# Altium PCB DAQ_PCB.PcbDoc
Units mm, origin at the board's own origin, x right, y up, seen from the top; angles counter-clockwise.
Board outline 85 x 50 mm, 2 copper layers (Top Layer, Bottom Layer); 59 components, 59 nets, 291 pads, 0 vias.
Unrouted connection lines stored in the file: 136.
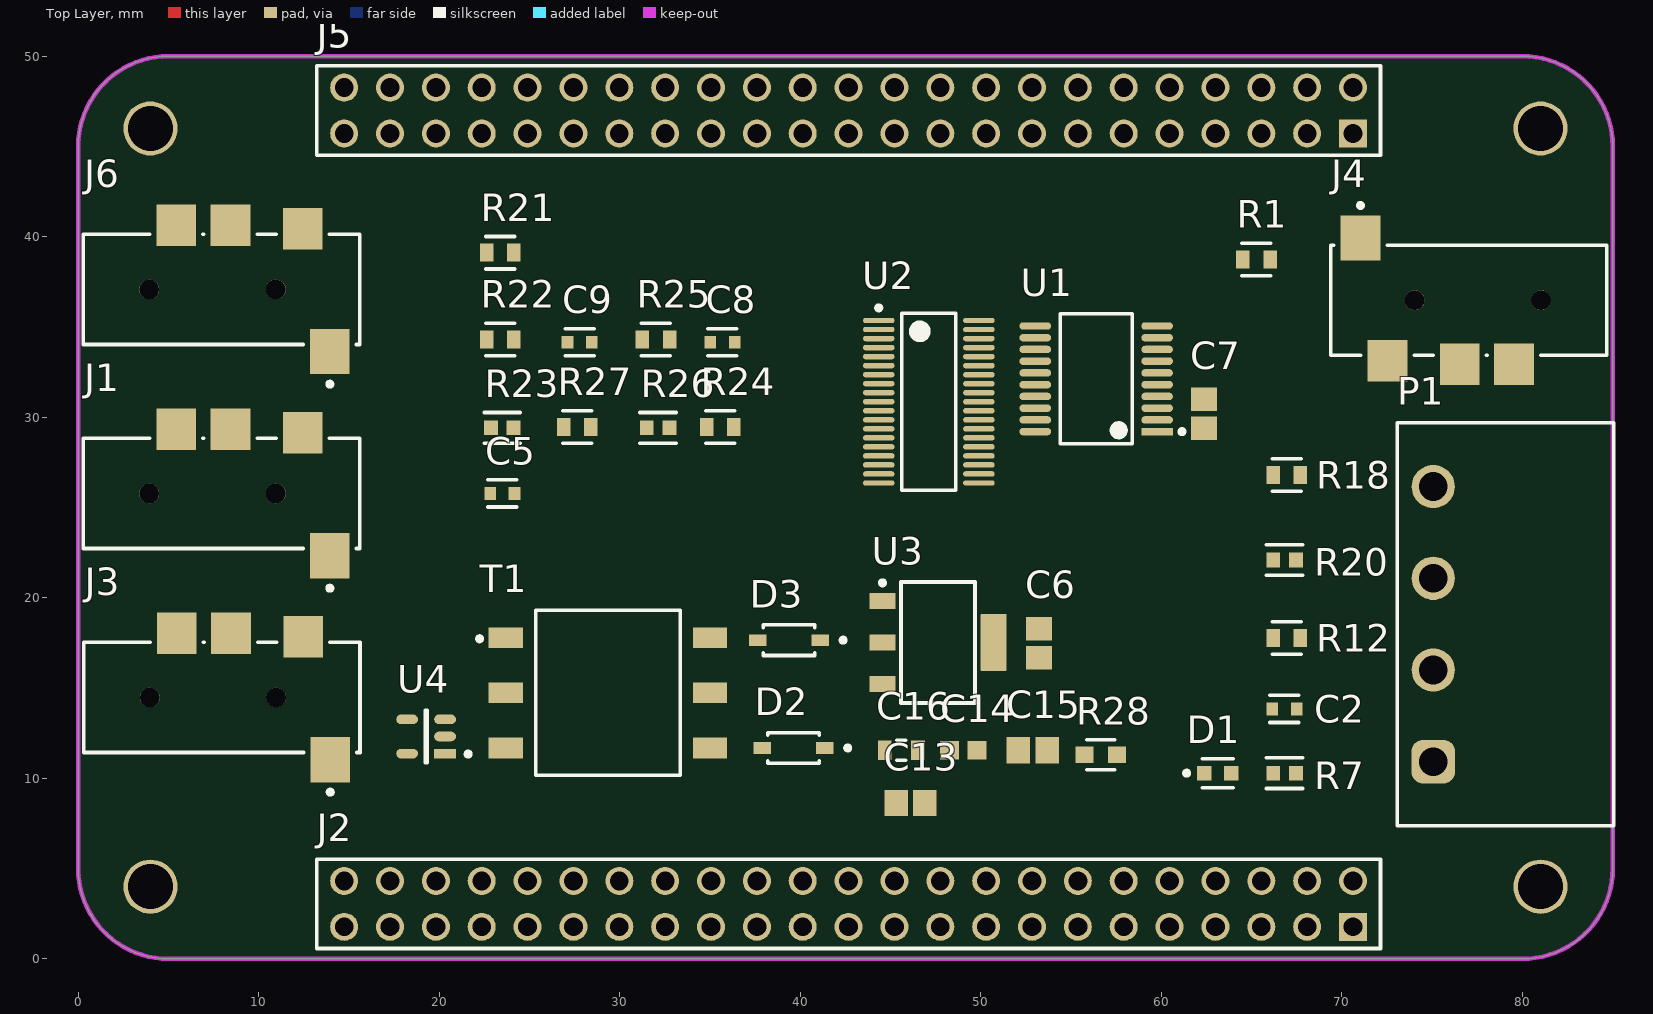
[diagram p0: Top Layer view]
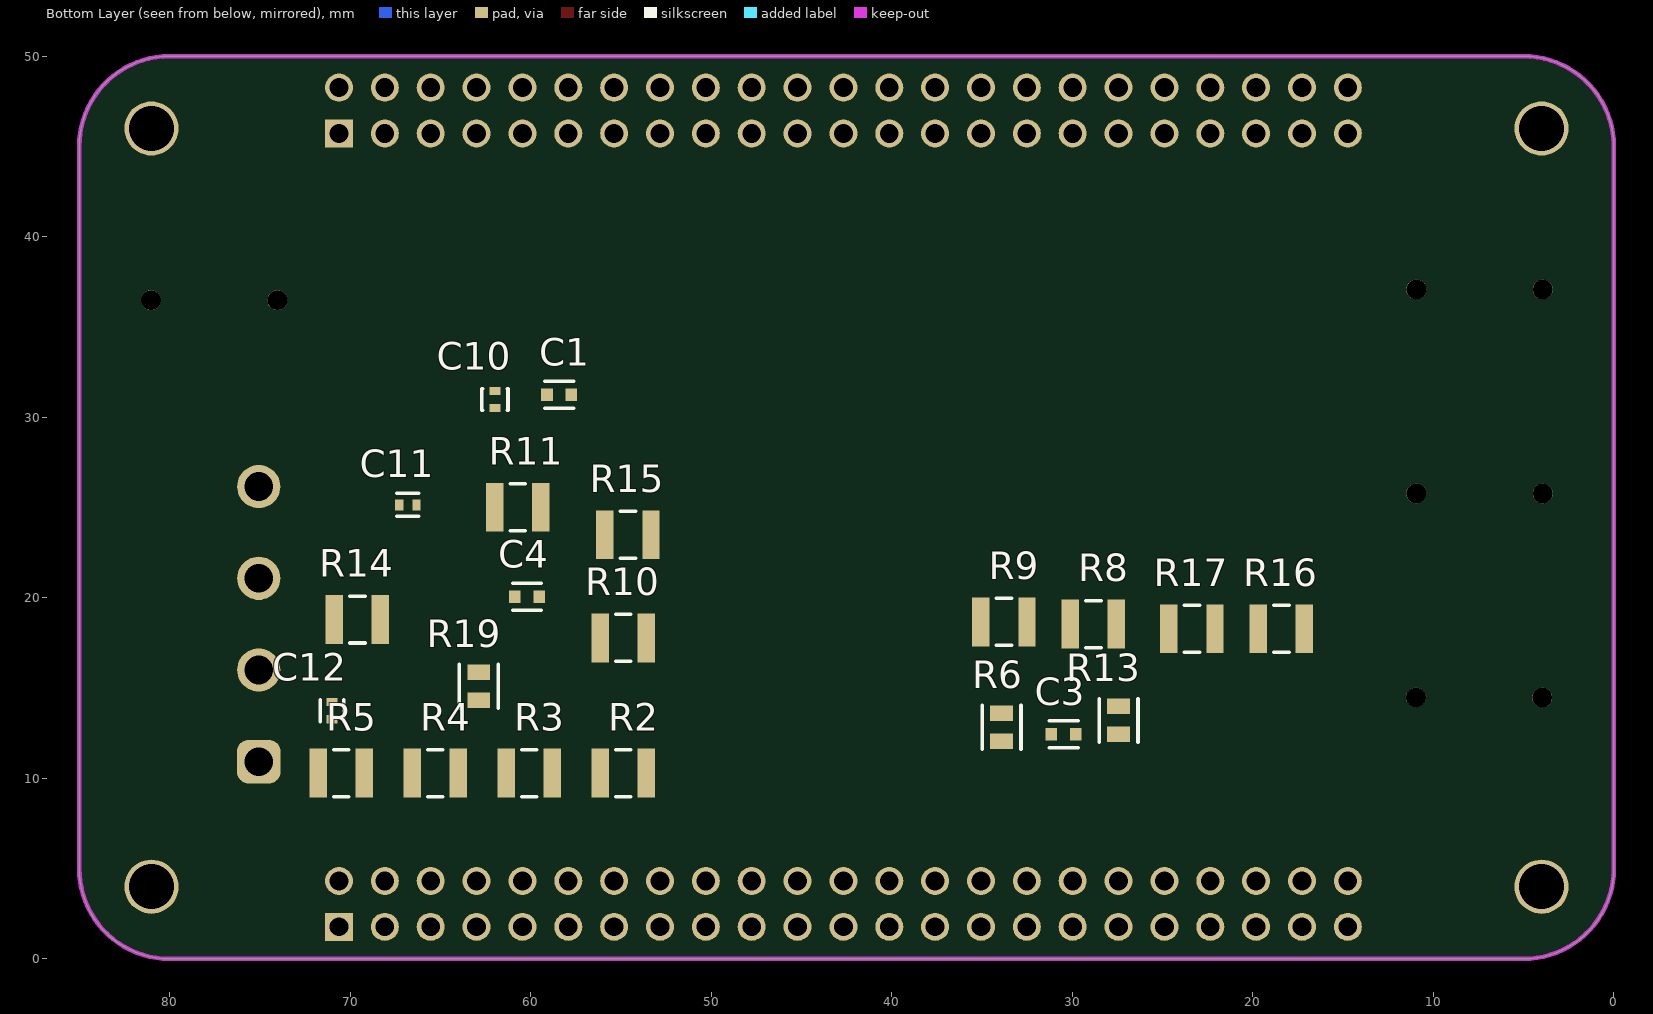
[diagram p1: Bottom Layer view, seen from below]

## Layer stack, top to bottom
Top Solder: solder mask 0.0102, Solder Resist, Dk 3.5
Top Layer: signal copper 0.0356
Dielectric 1: dielectric 0.32, FR-4, Dk 4.8
Bottom Layer: signal copper 0.0356
Bottom Solder: solder mask 0.0102, Solder Resist, Dk 3.5

## Board outline
5,0 cw(c5,5) 0,5 0,45 cw(c5,45) 5,50 80,50 cw(c80,45) 85,45 85,5 cw(c80,5) 80,0

## Design rules (kind name [scope] priority, off if disabled: settings)
Clearance [All] p1: gap=0.254 ignorepadtopadclearanceinfootprint=FALSE
PolygonConnect [All] p1: connectstyle=Relief reliefconductorwidth=0.254 reliefentries=4 polygonreliefangle="90 Angle" airgapwidth=0.254
RoutingVias [All] p1: holewidth=0.711 width=1.27 viastyle="Through Hole" minholewidth=0.711 minwidth=1.27 maxholewidth=0.711 maxwidth=1.27
SolderMaskExpansion [All] p1: expansion=0.102 istentingtop=FALSE
SupplyNets "Schematic Supply Nets_6" [InNet('GNDD')] p1: voltage=0.000
SupplyNets "Schematic Supply Nets_5" [InNet('+3V3')] p2: voltage=0.000
SupplyNets "Schematic Supply Nets_4" [InNet('GND_ISO')] p3: voltage=0.000
SupplyNets "Schematic Supply Nets_3" [InNet('+V_ISO')] p4: voltage=0.000
SupplyNets "Schematic Supply Nets_1" [InNet('+5V_ISO')] p5: voltage=0.000
SupplyNets "Schematic Supply Nets" [InNet('+5V')] p6: voltage=0.000
Width [All] p1: maxlimit=0.254 minlimit=0.254 preferedwidth=0.254
30 further rules are at their usual default settings.

## Components (designator, comment, footprint, x,y, rotation, side; value= is the part's Value field where it differs from the comment)
C1 "GCD188R71H472KA01D" FP-GCD188-0_1-MFG 58.42,31.242 r180 bottom
C2 "GCD188R71H472KA01D" FP-GCD188-0_1-MFG 66.816,13.843 r0 top
C3 "GCD188R71H472KA01D" FP-GCD188-0_1-MFG 30.48,12.446 r180 bottom
C4 "GCD188R71H472KA01D" FP-GCD188-0_1-MFG 60.198,20.066 r180 bottom
C5 "GCD188R71H472KA01D" FP-GCD188-0_1-MFG 23.493,25.781 r0 top
C6 "100nF" CAPC2013X145X50NL20T25 53.213,17.488 r270 top
C7 "100nF" CAPC2013X145X50NL20T25 62.357,30.188 r90 top
C8 "GCD188R71H472KA01D" FP-GCD188-0_1-MFG 35.687,34.163 r0 top
C9 "GCD188R71H472KA01D" FP-GCD188-0_1-MFG 27.773,34.163 r0 top
C10 "2.2uF" FP-ZRB155-0_2-MFG 61.976,30.988 r90 bottom
C11 "10uF" FP-GRM155-0_2-MFG 66.802,25.146 r180 bottom
C12 "10uF" FP-GRM155-0_2-MFG 70.993,13.749 r90 bottom
C13 "100nF" CAPC2013X145X50NL20T25 46.101,8.636 r180 top
C14 "330nF" CAPC1608X90X35NL15T15 49.022,11.557 r180 top
C15 "100nF" CAPC2013X145X50NL20T25 52.87,11.557 r0 top
C16 "1uF" FP-CGA3E-0_3-0_1-IPC_B 45.593,11.557 r0 top
D1 "LG Q396-PS-35" FP-LG_Q396-MFG 63.119,10.287 r0 top
D2 "BAT46ZFILM" FP-SOD-123-MFG 39.624,11.684 r180 top value=10pF
D3 "BAT46ZFILM" FP-SOD-123-MFG 39.37,17.653 r180 top value=10pF
J1 "SJ2-3574A-SMT-TR" FP-SJ2-3574A-SMT-TR-MFG 7.937,25.781 r0 top
J2 "SSW-123-06-T-D" SMTC-SSW-123-06-X-D 70.612,1.778 r180 top
J3 "SJ2-3574A-SMT-TR" FP-SJ2-3574A-SMT-TR-MFG 7.961,14.484 r0 top
J4 "SJ2-3574A-SMT-TR" FP-SJ2-3574A-SMT-TR-MFG 77.026,36.484 r180 top
J5 "SSW-123-06-T-D" SMTC-SSW-123-06-X-D 70.612,45.72 r180 top
J6 "SJ2-3574A-SMT-TR" FP-SJ2-3574A-SMT-TR-MFG 7.937,37.084 r0 top
P1 "691313510004" 691313510004 79.057,18.542 r90 top
R1 "CRCW06033K30FKECHP" FP-CRCW0603-HPe3-MFG 65.266,38.735 r0 top
R2 "270k" FP-CRGCQ1210-IPC_C 54.864,10.287 r180 bottom value=270KΩ
R3 "270k" FP-CRGCQ1210-IPC_C 60.071,10.287 r180 bottom value=270KΩ
R4 "270k" FP-CRGCQ1210-IPC_C 65.278,10.287 r180 bottom value=270KΩ
R5 "270k" FP-CRGCQ1210-IPC_C 70.485,10.287 r180 bottom value=270KΩ
R6 "22k" FP-ESR10-IPC_C 33.909,12.827 r90 bottom
R7 "CRGCQ0603F100R" FP-CRGCQ0603-IPC_C 66.822,10.287 r0 top value=100Ω
R8 "270k" FP-CRGCQ1210-IPC_C 28.829,18.542 r180 bottom value=270KΩ
R9 "270k" FP-CRGCQ1210-IPC_C 33.782,18.669 r180 bottom value=270KΩ
R10 "270k" FP-CRGCQ1210-IPC_C 54.864,17.78 r180 bottom value=270KΩ
R11 "270k" FP-CRGCQ1210-IPC_C 60.713,25.019 r180 bottom value=270KΩ
R12 "CRCW06033K30FKECHP" FP-CRCW0603-HPe3-MFG 66.941,17.78 r0 top
R13 "22k" FP-ESR10-IPC_C 27.432,13.208 r90 bottom
R14 "270k" FP-CRGCQ1210-IPC_C 69.596,18.796 r180 bottom value=270KΩ
R15 "270k" FP-CRGCQ1210-IPC_C 54.61,23.495 r180 bottom value=270KΩ
R16 "270k" FP-CRGCQ1210-IPC_C 18.415,18.288 r180 bottom value=270KΩ
R17 "270k" FP-CRGCQ1210-IPC_C 23.368,18.288 r180 bottom value=270KΩ
R18 "CRCW06033K30FKECHP" FP-CRCW0603-HPe3-MFG 66.941,26.797 r0 top
R19 "22k" FP-ESR10-IPC_C 62.865,15.098 r90 bottom
R20 "CRGCQ0603F100R" FP-CRGCQ0603-IPC_C 66.822,22.098 r0 top value=100Ω
R21 "CRCW06033K30FKECHP" FP-CRCW0603-HPe3-MFG 23.368,39.116 r0 top
R22 "CRCW06033K30FKECHP" FP-CRCW0603-HPe3-MFG 23.368,34.313 r0 top
R23 "CRGCQ0603F100R" FP-CRGCQ0603-IPC_C 23.487,29.414 r0 top value=100Ω
R24 "CRCW06033K30FKECHP" FP-CRCW0603-HPe3-MFG 35.56,29.464 r0 top
R25 "CRCW06033K30FKECHP" FP-CRCW0603-HPe3-MFG 32.004,34.313 r0 top
R26 "CRGCQ0603F100R" FP-CRGCQ0603-IPC_C 32.123,29.414 r0 top value=100Ω
R27 "CRCW06033K30FKECHP" FP-CRCW0603-HPe3-MFG 27.648,29.464 r0 top
R28 "330R" FP-RN731J-MFG 56.642,11.303 r0 top value=330Ω
T1 "750313626" WE-PPTI_1209_L12.7W9.14H7.62 29.337,14.732 r0 top
U1 "ADUM3150BRSZ-RL7" FP-RS-20-IPC_C 56.388,32.131 r180 top
U2 "ADS8688IDBTR" DBT38_N 47.117,30.861 r0 top
U3 "LM1117" DCY0004A_L 47.625,17.526 r0 top
U4 "SN6501DBVR" FP-DBV0005A-IPC_C 19.27,12.319 r180 top

## Footprints (in the part's own frame and the unit in brackets; to place one, negate y for a bottom-side part, rotate by r counter-clockwise, add the part's x,y. Pads: shape width x height; smd on the part's side, far side on the other; paste and mask are expansions set on the pad)
691313510004 [mm] "5,08mm - PCB Headers - Horizontal - Closed ends - 04p"
  rrect50% 2.4x2.4 hole 1.6: 1(-7.62,4)
  round 2.4 hole 1.6: 2(-2.54,4) 3(2.54,4) 4(7.62,4)
  silkscreen extent -11.16,-6 11.16,6, body extent -11.16,-6 11.16,6, height 8.55
CAPC1608X90X35NL15T15 [mm] "Chip Capacitor, 2-Leads, Body 1.60x0.81mm, IPC Medium Density"
  rect 1.05x1 smd: 1(-0.75,0) 2(0.75,0)
  body extent -0.88,-0.48 0.87,0.48, height 0.9
CAPC2013X145X50NL20T25 [mm] "Chip Capacitor, 2-Leads, Body 2.00x1.25mm, IPC Medium Density"
  rect 1.3x1.45 smd: 1(-0.8,0) 2(0.8,0)
  body extent -1.1,-0.72 1.1,0.72, height 1.45
DBT38_N [mm] "TSSOP, 38-Leads, Body 9.7x4.4mm, Pitch 0.5mm, IPC Medium Density"
  oval 1.75x0.3 smd: 1(-2.775,4.5) 2(-2.775,4) 3(-2.775,3.5) 4(-2.775,3) 5(-2.775,2.5) 6(-2.775,2) 7(-2.775,1.5) 8(-2.775,1) 9(-2.775,0.5) 10(-2.775,0) 11(-2.775,-0.5) 12(-2.775,-1) 13(-2.775,-1.5) 14(-2.775,-2) 15(-2.775,-2.5) 16(-2.775,-3) 17(-2.775,-3.5) 18(-2.775,-4) 19(-2.775,-4.5) 20(2.775,-4.5) 21(2.775,-4) 22(2.775,-3.5) 23(2.775,-3) 24(2.775,-2.5) 25(2.775,-2) 26(2.775,-1.5) 27(2.775,-1) 28(2.775,-0.5) 29(2.775,0) 30(2.775,0.5) 31(2.775,1) 32(2.775,1.5) 33(2.775,2) 34(2.775,2.5) 35(2.775,3) 36(2.775,3.5) 37(2.775,4) 38(2.775,4.5)
  silkscreen extent -2.9,-4.9 1.5,5.32, body extent -2.25,-4.9 2.25,4.9, height 1.2
DCY0004A_L [mm] "SOT223, 4-Leads, Body 6.7x3.7mm, Pitch 2.3mm, IPC High Density"
  rrect11% 1.45x0.9 smd: 1(-3.075,2.3) 2(-3.075,0) 3(-3.075,-2.3)
  rrect7% 1.45x3.15 smd: 4(3.075,0)
  silkscreen extent -3.2,-3.35 2.05,3.42, body extent -3.5,-3.25 3.5,3.25, height 1.62
FP-CGA3E-0_3-0_1-IPC_B [mm]
  rect 0.756x1.106 smd paste+0 mask+0: 1(-0.925,0) 2(0.925,0)
  silkscreen extent -0.25,-0.55 0.25,0.55, body extent -1.55,-0.8 1.55,0.8, height 0.25
FP-CRCW0603-HPe3-MFG [mm]
  rect 0.75x1 smd paste+0 mask+0: 1(-0.75,0) 2(0.75,0)
  silkscreen extent -0.8,-0.9 0.8,0.9, body extent -1.22,-0.6 1.22,0.6, height 0.25
FP-CRGCQ0603-IPC_C [mm]
  rect 0.758x0.812 smd paste+0 mask+0: 1(-0.627,0) 2(0.627,0)
  silkscreen extent -1.01,-0.85 1.01,0.85, body extent -1.11,-0.55 1.11,0.55, height 0.25
FP-CRGCQ1210-IPC_C [mm]
  rect 0.958x2.706 smd paste+0 mask+0: 1(-1.277,0) 2(1.277,0)
  silkscreen extent -0.42,-1.3 0.42,1.3, body extent -1.55,-1.3 1.55,1.3, height 0.65
FP-DBV0005A-IPC_C [mm]
  rect 1.205x0.532 smd paste+0 mask+0: 1(-1.05,0.95)
  rrect100% 1.205x0.532 smd paste+0 mask+0: 2(-1.05,0) 3(-1.05,-0.95) 4(1.05,-0.95) 5(1.05,0.95)
  silkscreen extent -2.45,-1.45 0.05,1.45, body extent -1.75,-1.55 1.75,1.55, height 0.25
FP-ESR10-IPC_C [mm]
  rect 0.858x1.262 smd paste+0 mask+0: 1(-0.777,0) 2(0.777,0)
  silkscreen extent -1.21,-1.07 1.21,1.07, body extent -1,-0.63 1,0.63, height 0.65
FP-GCD188-0_1-MFG [mm]
  rect 0.65x0.7 smd paste+0 mask+0: 1(-0.675,0) 2(0.675,0)
  silkscreen extent -0.8,-0.75 0.8,0.75, body extent -0.8,-0.4 0.8,0.4, height 0.9
FP-GRM155-0_2-MFG [mm]
  rect 0.45x0.6 smd paste+0 mask+0: 1(-0.475,0) 2(0.475,0)
  silkscreen extent -0.6,-0.64 0.6,0.65, body extent -0.5,-0.25 0.5,0.25, height 0.7
FP-LG_Q396-MFG [mm]
  rect 0.8x0.8 smd paste+0 mask+0: 1(-0.75,0) 2(0.75,0)
  silkscreen extent -1.85,-0.8 0.85,0.8, body extent -1.25,-0.55 1.25,0.55, height 0.25
FP-RN731J-MFG [mm]
  rect 1x0.9 smd paste+0 mask+0: 1(-0.9,0) 2(0.9,0)
  silkscreen extent -0.77,-0.82 0.77,0.82, body extent -1.5,-0.55 1.5,0.55, height 0.25
FP-RS-20-IPC_C [mm]
  rect 1.753x0.415 smd paste+0 mask+0: 1(-3.375,2.925)
  rrect100% 1.753x0.415 smd paste+0 mask+0: 2(-3.375,2.275) 3(-3.375,1.625) 4(-3.375,0.975) 5(-3.375,0.325) 6(-3.375,-0.325) 7(-3.375,-0.975) 8(-3.375,-1.625) 9(-3.375,-2.275) 10(-3.375,-2.925) 11(3.375,-2.925) 12(3.375,-2.275) 13(3.375,-1.625) 14(3.375,-0.975) 15(3.375,-0.325) 16(3.375,0.325) 17(3.375,0.975) 18(3.375,1.625) 19(3.375,2.275) 20(3.375,2.925)
  silkscreen extent -4.88,-3.6 2,3.6, body extent -4.35,-3.7 4.35,3.7, height 0.25
FP-SJ2-3574A-SMT-TR-MFG [mm]
  rect 2.2x2.5 smd paste+0 mask+0: 1(6,-3.45)
  rect 2.2x2.3 smd paste+0 mask+0: 2(4.5,3.35) 3(0.5,3.55) 4(-2.5,3.55)
  round 1.1 hole 1.1 unplated paste-2539.97 mask+0: ""(-4,0) ""(3,0)
  silkscreen extent -7.65,-5.37 7.65,3.05, body extent -7.75,-4.8 7.75,4.8, height 0.25
FP-SOD-123-MFG [mm]
  rect 0.97x0.65 smd paste+0 mask+0: 1(-1.74,0) 2(1.74,0)
  silkscreen extent -3.13,-0.85 1.43,0.85, body extent -2.32,-0.95 2.32,0.95, height 0.25
FP-ZRB155-0_2-MFG [mm]
  rect 0.45x0.6 smd paste+0 mask+0: 1(-0.475,0) 2(0.475,0)
  silkscreen extent -0.6,-0.72 0.6,0.72, body extent -0.5,-0.25 0.5,0.25, height 0.65
SMTC-SSW-123-06-X-D [mm] "SQ Post Socket, 2x23 Pins, Vertical, 2.54mm Pitch, Female"
  rect 1.55x1.55 hole 1.04: 1(0,0)
  round 1.55 hole 1.04: 2(0,-2.54) 3(2.54,0) 4(2.54,-2.54) 5(5.08,0) 6(5.08,-2.54) 7(7.62,0) 8(7.62,-2.54) 9(10.16,0) 10(10.16,-2.54) 11(12.7,0) 12(12.7,-2.54) 13(15.24,0) 14(15.24,-2.54) 15(17.78,0) 16(17.78,-2.54) 17(20.32,0) 18(20.32,-2.54) 19(22.86,0) 20(22.86,-2.54) 21(25.4,0) 22(25.4,-2.54) 23(27.94,0) 24(27.94,-2.54) 25(30.48,0) 26(30.48,-2.54) 27(33.02,0) 28(33.02,-2.54) 29(35.56,0) 30(35.56,-2.54) 31(38.1,0) 32(38.1,-2.54) 33(40.64,0) 34(40.64,-2.54) 35(43.18,0) 36(43.18,-2.54) 37(45.72,0) 38(45.72,-2.54) 39(48.26,0) 40(48.26,-2.54) 41(50.8,0) 42(50.8,-2.54) 43(53.34,0) 44(53.34,-2.54) 45(55.88,0) 46(55.88,-2.54)
  silkscreen extent -1.53,-3.74 57.41,1.2, body extent -1.52,-3.75 57.4,1.21, height 8.51
WE-PPTI_1209_L12.7W9.14H7.62 [mm] "Push-Pull Transformer, SMT, body 12.70 x 9.14 mm"
  rect 1.9x1.14 smd: 1(-5.655,3.05) 2(-5.655,0) 3(-5.655,-3.05) 4(5.655,-3.05) 5(5.655,0) 6(5.655,3.05)
  silkscreen extent -7.22,-4.57 4,4.57, body extent -6,-4.44 6,4.44, height 7.34

## Part data
C1 C2 C3 C4 C5 C8 C9: library part CMP-06035-049634-1, "Chip Multilayer Ceramic Capacitors for Automotive, 0603, 4700pF, X7R, 15%, 10%, 50V, Grade 1", Capacitance=4.7nF, Case Code (Imperial)=0603, Case Code (Metric)=1608, Dielectric=X7R, Max Operating Temperature=125°C, Min Operating Temperature=-55°C, Package Quantity=4000, Ratings=AEC-Q200, Tolerance=10%, Voltage Rating=50V, Case/Package=0603, Height=0.8mm, Length=0.063inch, Mount="Surface Mount", Packaging="Tape and Reel", Termination=SMD/SMT, Thickness=0.031inch, Voltage Rating (DC)=50V, Weight=0.000222oz, Width=0.8mm
C6 C7 C13 C15: library part CMP-2007-01227-1, Manufacturer=Kemet, Part Number=C0805S104K5RACTU
C10: library part CMP-06035-063357-1, "Low Acoustic Noise Chip Multilayer Ceramic Capacitors on Interposer Board for General Purpose ZRB Series 0402 Package X5R @ 15% 25Vdc 2.2uF @ 20%"
C11 C12: library part CMP-00260-135863761-1, "GRM155D70G106ME18D SMD Chip Multilayer Ceramic Capacitor", Capacitance=10µF, Case/Package=0402, Dielectric=X7T, Voltage Rating (DC)=4V, Length=1mm, Lifecycle Status=Production, NexarPartId=135863761, Thickness=500µm, Width=500µm
C14: library part CMP-1035-02674-2, Manufacturer="AVX Interconnect / Elco", Part Number=06033D334KAT2A
C16: library part CMP-08246-001878-1, "Cap Ceramic 1uF 25V X7R 20% Pad SMD 0603 +125°C Automotive T/R", Case Code (Imperial)=0603, Case Code (Metric)=1608, Dielectric=X7R, Max Operating Temperature=125°C, Min Operating Temperature=-55°C, Package Quantity=4000, Ratings=AEC-Q200, Tolerance=20%, Voltage Rating=25V, Capacitance=1uF, Case/Package=0603, Height=0.8mm, Length=0.063inch, Mount="Surface Mount", Packaging="Tape and Reel", Thickness=0.031inch, Voltage Rating (DC)=25V, Weight=7.1E-05oz, Width=0.031inch
D1: library part CMP-62016-000069-1, "LED GREEN DIFFUSED 0603 SMD", Case Code (Imperial)=0603, Case Code (Metric)=1608, Color=Green, Forward Current=20mA, Forward Voltage=2V, Lens Color=White, Case/Package=0603, Dominant Wavelength=573nm, Height=0.4mm, Length=1.6mm, Lens Size=0.8mm, Lens Style=Flat, Lens Transparency=Diffused, Luminous Intensity=163mcd, Mount="Surface Mount", Packaging="Tape and Reel", REACH SVHC="No SVHC", RoHS Compliant=Yes, Test Current=20mA, Viewing Angle=120°, Wavelength=573nm, Width=0.8mm
D2 D3: library part CMP-12187-000006-1, "DIODE SCHOTTKY 100V 150MA SOD123", Capacitance=10pF, Forward Current=150mA, Manufacturer=STMicroelectronics, Max Junction Temp=+150°C, Max Repetitive Reverse Voltage=100V, Max Surge Forward Current=1A, Package=SOD-123, Peak Reverse Current=5uA, Temperature="to +150°C", Automotive=No, Category=Diode, ComponentLink2Description=Datasheet, ComponentLink2URL=https://www.st.com/resource/en/datasheet/bat46.pdf, Device Class L1="Discrete Semiconductors", Device Class L2=Diodes, Device Class L3="Schottky Diodes", Digikey Description="DIODE SCHOTTKY 100V 150MA SOD123", Height=1.45mm, Ipc Land Pattern Name=SOD375155X145-2, Lead Free=Yes, Manufacturer Part Number=BAT46ZFILM, Mouser Description="Schottky Diodes & Rectifiers schottky diode", Octopart=https://octopart.com/bat46zfilm-stmicroelectronics-658190, RoHS=TRUE, Standoff Height=0mm, Temperature Range High=+150°C
J1 J3 J4 J6: library part CMP-14818-000001-1, "AUDIO JACK, 3.5 MM, RT, 4 CONDUC", Current Rating=1A, Manufacturer=CUI, Temperature="-25°C to +85°C", Temperature Range High=+85°C, Temperature Range Low=-25°C, Voltage Rating=12V, Automotive=No, Category=Conn, ComponentLink2Description=Datasheet, ComponentLink2URL=https://www.cui.com/product/resource/sj2-357x-smt.pdf, Conn Orientation=Horizontal, Contact Material=Silver, Device Class L1=Connectors, Device Class L2="Audio / Video Connectors", Device Class L3=unset, Digikey Description="AUDIO JACK, 3.5 MM, RT, 4 CONDUC", Height=5.3mm, Lead Free=Yes, Manufacturer Part Number=SJ2-3574A-SMT-TR, Number Of Contacts=4, Octopart=https://octopart.com/sj2-3574a-smt-tr-cui-77838840, Package=SJ2-3574A-SMT-TR, RoHS=TRUE
J2 J5: library part CMP-1023-00471-1, "SQ Post Socket, Through-hole, Vertical, -55 to 105 degC, 2.54 mm Pitch, 46-Pin, Female, RoHS", Manufacturer=Samtec, Temperature Range="-55 to 105 degC", ComponentLink1Description="Manufacturer URL", ComponentLink1URL=http://www.samtec.com, ComponentLink2Description=Datasheet, ComponentLink2URL=http://www.samtec.com/documents/webfiles/pdf/SSW_TH.PDF, ComponentLink3Description="Package Specification", ComponentLink3URL=http://www.samtec.com/documents/webfiles/cpdf/SSW-1XX-XX-XXX-X-XX-XXX-XX-MKT.pdf, DatasheetVersion=F-214, Mounting Technology=Through-hole, Orientation=Vertical, PackageDescription="Assembly, Socket Strip .016 X .031 Tail", PackageReference=SSW-123-06-X-D, PackageVersion="CA, 6/1987", PartNumber=SSW-123-06-T-D, Pitch="2.54 mm", RoHS=True
P1: library part CMP-1502-02194-2, Color=Green, Current=20A, Voltage=300V, Contact Material=Brass, Contact Plating=Tin, Gender=Male, Height=12mm, Lead Pitch=5.08mm, Length=11.5mm, Mount="Through Hole", NexarPartId=8917761, Number Of Contacts=4, Number of Levels=1, Number of Pins=4, Number of Positions Per Level=4, Number of Rows=1, Packaging=Box, Pitch=5.08mm, REACH SVHC=Unknown, RoHS=Compliant, Termination=Solder, Width=22.32mm
R1 R12 R18 R21 R22 R24 R25 R27: library part CMP-02407-003357-1, "RES Thick Film, 3.3kΩ, 1%, 0.33W, 100ppm/°C, 0603", Case/Package=0603, Power Rating=100mW, Resistance=3.3kR, Tolerance=1%, Lead Free="Lead Free"
R2 R3 R4 R5 R8 R9 R10 R11 R14 R15 R16 R17: library part CMP-03211-000064-1, "CRGCQ1210 270KΩ 0.5W ±100ppm/°C 1% 200V", Ambient Temperature Range High=+70°C, Manufacturer="TE Connectivity", Manufacturer Part Number=CRGCQ1210F270K, Package=CRGCQ1210, Power Rating=0.5W, Resistance=270KΩ, Temperature="-55°C to +155°C", Temperature Coefficient=±100ppm/°C, Temperature Range High=+155°C, Temperature Range Low=-55°C, Tolerance=0.01, Voltage Rating=200V, Automotive=Yes, Automotive Grade="Grade 1235", Category=Res, ComponentLink2Description=Datasheet, ComponentLink2URL=https://www.te.com/commerce/DocumentDelivery/DDEController?Action=showdoc&DocId=Data+Sheet%7F1773204-3%7F1%7Fpdf%7FEnglish%7FENG_DS_1773204-3_1.pdf%7F4-2176347-1244, Composition="Thick Film", Device Class L1="Passive Components", Device Class L2=Resistors, Device Class L3="Chip SMD Resistors", Height=0.65mm, Ipc Land Pattern Name=RESC310260X55, Lead Free=Yes, Octopart=https://octopart.com/crgcq1210f270k-te+connectivity-91018371, RoHS=TRUE, Series=CRGCQ
R6 R13 R19: library part CMP-08839-028387-1, "22kΩ ±1% 0.4W 0805 Anti-Surge Chip Resistor AEC-Q200", Case/Package=0805, Max Operating Temperature=155°C, Max Power Dissipation=400mW, Min Operating Temperature=-55°C, Package Quantity=5000, Resistance=22kR, Resistor Type="Thick Film", Temperature Coefficient=100ppm/°C, Tolerance=1%, Features="Automotive AEC-Q200", Height=0.026inch, Length=0.079inch, Number of Terminations=2, Packaging="Tape and Reel", RoHS Compliant=Yes, Series=ESR10, Width=0.049inch
R7 R20 R23 R26: library part CMP-03211-002191-1, "CRGCQ0603 100Ω 1% ±200ppm/°C 75V", Ambient Temperature Range High=+70°C, Manufacturer="TE Connectivity", Package=CRGCQ0603, Power Rating=0.1W, Resistance=100Ω, Temperature="-55°C to +155°C", Temperature Coefficient=±200ppm/°C, Temperature Range High=+155°C, Temperature Range Low=-55°C, Tolerance=0.01, Voltage Rating=75V, Category=Res, ComponentLink2Description=Datasheet, ComponentLink2URL=https://www.te.com/commerce/DocumentDelivery/DDEController?Action=showdoc&DocId=Data+Sheet%7F1773204-3%7F1%7Fpdf%7FEnglish%7FENG_DS_1773204-3_1.pdf%7F4-2176339-466, Composition="Thick Film", Device Class L1="Passive Components", Device Class L2=Resistors, Device Class L3="Chip SMD Resistors", Height=0.55mm, Ipc Land Pattern Name=RESC16080X45, Lead Free=Yes, Manufacturer Part Number=CRGCQ0603F100R, Octopart=https://octopart.com/crgcq0603f100r-te+connectivity-91018035, RoHS=TRUE, Series=CRGCQ
R28: library part CMP-03211-003888-1, "Thin Film Resistors RN 0603 330Ω 0.1% 10ppm/°C", Manufacturer="TE Connectivity", Manufacturer Part Number=RN73C1J330RBTDF, Package=RN731J, Power Rating=0.063W, Resistance=330Ω, Temperature="-55°C to +155°C", Temperature Coefficient=10ppm/°C, Temperature Range High=+155°C, Temperature Range Low=-55°C, Tolerance=0.1%, Voltage Rating=50V, Automotive=No, Category=Res, ComponentLink2Description=Datasheet, ComponentLink2URL=https://www.te.com/commerce/DocumentDelivery/DDEController?Action=showdoc&DocId=Data+Sheet%7F1773270%7FP%7Fpdf%7FEnglish%7FENG_DS_1773270_P.pdf%7F9-1614352-9, Composition="Thin Film", Device Class L1="Passive Components", Device Class L2=Resistors, Device Class L3="Chip SMD Resistors", Height=0.55mm, Ipc Land Pattern Name=RESC15580X45, Lead Free=Yes, Octopart=https://octopart.com/rn73c1j330rbtdf-te+connectivity-22740699, octopart_url=https://octopart.com/rn73c1j330rbtdf-te+connectivity-22740699, Packaging="1000 Reel", RoHS=TRUE, Series=RN73
T1: library part CMP-03913-34483586-1, "750313626 TRANSFORMER, AEC-Q200, 1: 2, 340UH, SMT; Inductance: 340µH; Product Range: MID-PPTI Series; SVHC: No SVHC (15-Jan-2019)", Case/Package=SMD/SMT, Current Rating=150mA, DC Resistance (DCR)=581mΩ, Inductance=340µH, Isolation Voltage=5kV, Max Operating Temperature=125°C, Min Operating Temperature=-40°C, Height=7.62mm, Height - Seated (Max)=7.62mm, Length=9.14mm, Mount="Surface Mount", NexarPartId=34483586, Packaging="Tape & Reel (TR)", RoHS=Compliant, Shielding=Unshielded, Termination=SMD/SMT, Turns Ratio=1:2, Width=8mm
U1: library part CMP-09093-000021-1, "DGT ISOL 3750VRMS 6CH SPI 20SSOP", Case/Package=SSOP, Isolated Power=No, Isolation Voltage=3.75kV, Max Operating Temperature=125°C, Max Supply Voltage=5.5V, Min Operating Temperature=-40°C, Min Supply Voltage=3V, Package Quantity=500, Channel Type=Unidirectional, Contact Plating=Tin, Data Rate=80Mbps, Lead Free="Contains Lead", Mount="Surface Mount", Number of Channels=6, Number of Pins=20, Packaging="Tape and Reel", Polarity=Bidirectional, Propagation Delay=14ns, Pulse Width Distortion (PWD)=2ns, RoHS Compliant=Yes, Turn-On Delay Time=14ns, Weight=0.016oz
U2: library part CMP-0003-02189-1, "Single-Supply, SAR ADCs with Bipolar Input Ranges, 16 Bits, 500 kSPS, 8 Channel, -40 to 125 degC, 38-Pin TSSOP (DBT), Green (RoHS & no Sb/Br), Tape and Reel", Manufacturer="Texas Instruments", Temperature Range="-40 to 125 degC", AVDD="4.75 to 5.25 V", ComponentLink1Description="Manufacturer URL", ComponentLink1URL=www.ti.com, ComponentLink2Description=Datasheet, ComponentLink2URL=http://www.ti.com/lit/ds/symlink/ads8688.pdf, ComponentLink3Description="Package Specification", ComponentLink3URL=http://www.ti.com/lit/ml/mpds368/mpds368.pdf, DatasheetVersion=SBAS582B, Eco-Plan="Green (RoHS & no Sb/Br)", Input Channel=8, Mounting Technology="Surface Mount", PackageDescription="38-Pin Plastic Small Outline Package, Body 9.7 x 4.4 mm, Pitch 0.5 mm", PackageVersion=4073252-6/I, Packing="Tape and Reel", PartNumber=ADS8688IDBTR, Resolution="16 Bits", Sample Rate="500 kSPS", SNR="92 dB", THD="-102 dB"
U3: library part CMP-0062-01635-4, "800mA Low-Dropout Linear Regulator, 4-pin SOT-223, Pb-Free", Manufacturer="Texas Instruments", PackageTopMarking=XYTT*N06A, PartNumber=LM1117MPX-5.0/NOPB, PowerWise=N, Code_IPC=SOT223-4, Code_JEDEC=TO-261-AA, ComponentLink1Description="Datasheet URL", ComponentLink1URL=http://www.ti.com/general/docs/lit/getliterature.tsp?genericPartNumber=LM1117-N&fileType=pdf, CompType="LDO IC", High-Reliability=Y, PackageDescription="Molded SOT-223, 6.50 x 3.56 x 1.6mm Body, 4 Lead, 2.3mm Pitch", PackageReference=DCY0004A, PinCount=4, RoHS=Y
U4: library part CMP-2000-07129-2, "IC REG CONV PWR SUPPLIES SOT23-5", Case/Package=SOT-23-5, Max Input Voltage=5.5V, Max Operating Temperature=125°C, Max Output Current=350mA, Min Input Voltage=3V, Min Operating Temperature=-40°C, Operating Supply Current=300uA, Output Current=250mA, Output Voltage=11V, Package Quantity=3000, Switching Frequency=620kHz, Contact Plating=Tin, Lead Free="Lead Free", Max Supply Voltage=5.5V, Min Supply Voltage=3V, Mount="Surface Mount", Number of Outputs=1, Number of Pins=5, Output Type=Adjustable, Packaging="Tape and Reel", REACH SVHC="No SVHC"

## Free pads (board coordinates)
  round 3 hole 2.5: 1(4,4) 1(4,46) 1(81,4) 1(81,46)

## Nets (pads, with @x,y where several pads share a name; then routed paths per layer and width w, separated by ;. In a path a pad name is that pad's centre, name@x,y a point inside that pad or via, vN(x,y) a via of type N, cw(c..) or ccw(c..) an arc to the next point about the centre after c; other vN are vias at no path point)
+3V3: C7.1 J5.5 J5.6 U1.1
+5V: J5.3 J5.4 T1.2 U4.2
+5V_ISO: C6.2 C13.1 C15.2 D1.2 U1.20 U2.9 U2.30 U2.34 U3.2 U3.4
+V_ISO: C14.2 C16.1 D2.1 D3.1 U3.3
GND_ISO: C6.1 C10.2 C11.2 C12.2 C13.2 C14.1 C15.1 C16.2 J1.1 J3.1 J4.1 J6.1 R7.1 R12.2 R20.1 R21.2 R23.1 R24.2 R26.1 R27.2 R28.1 T1.5 U1.11 U1.19 U2.3 U2.4 U2.6 U2.8 U2.28 U2.29 U2.31 U2.32 U2.33 U3.1
GNDD: C7.2 J2.1 J2.2 J5.1 J5.2 J5.43 J5.44 J5.45 J5.46 U1.2 U1.10 U4.4 U4.5
NetC1_1: C1.1 R5.2 R6.1 U2.18
NetC1_2: C1.2 R6.2 U2.19
NetC2_1: C2.1 R1.1 U2.16
NetC2_2: C2.2 R12.1 U2.17
NetC3_1: C3.1 R11.2 R13.1 U2.23
NetC3_2: C3.2 R13.2 U2.22
NetC4_1: C4.1 R17.2 R19.1 U2.21
NetC4_2: C4.2 R19.2 U2.20
NetC5_1: C5.1 R18.1 U2.14
NetC5_2: C5.2 R21.1 U2.15
NetC8_1: C8.1 R22.1 U2.12
NetC8_2: C8.2 R24.1 U2.13
NetC9_1: C9.1 R25.1 U2.27
NetC9_2: C9.2 R27.1 U2.26
NetC10_1: C10.1 C11.1 C12.1 U2.7
NetD1_1: D1.1 R28.2
NetD2_2: D2.2 T1.6
NetD3_2: D3.2 T1.4
NetJ1_2: J1.2 R1.2 R7.2
NetJ3_2: J3.2 R18.2 R20.2
NetJ4_2: J4.2 R22.2 R23.2
NetJ5_23: J5.23 J5.42 U1.8
NetJ5_27: J5.27 U1.7
NetJ5_28: J5.28 U1.6
NetJ5_29: J5.29 U1.4
NetJ5_30: J5.30 U1.5
NetJ5_31: J5.31 U1.3
NetJ6_2: J6.2 R25.2 R26.2
NetP1_1: P1.1
NetP1_2: P1.2 R14.1
NetP1_3: P1.3 R8.1
NetP1_4: P1.4 R2.1
NetR2_2: R2.2 R3.1
NetR3_2: R3.2 R4.1
NetR4_2: R4.2 R5.1
NetR8_2: R8.2 R9.1
NetR9_2: R9.2 R10.1
NetR10_2: R10.2 R11.1
NetR14_2: R14.2 R15.1
NetR15_2: R15.2 R16.1
NetR16_2: R16.2 R17.1
NetT1_1: T1.1 U4.1
NetT1_3: T1.3 U4.3
NetU1_13: U1.13 U2.35
NetU1_14: U1.14 U2.2
NetU1_15: U1.15 U2.38
NetU1_16: U1.16 U2.36
NetU1_17: U1.17 U2.1
NetU1_18: U1.18 U2.37
NetU2_10: U2.10
NetU2_11: U2.11
NetU2_24: U2.24
NetU2_25: U2.25
pads on no net: J1. J1.3 J1.4 J2.3 J2.4 J2.5 J2.6 J2.7 J2.8 J2.9 J2.10 J2.11 J2.12 J2.13 J2.14 J2.15 J2.16 J2.17 J2.18 J2.19 J2.20 J2.21 J2.22 J2.23 J2.24 J2.25 J2.26 J2.27 J2.28 J2.29 J2.30 J2.31 J2.32 J2.33 J2.34 J2.35 J2.36 J2.37 J2.38 J2.39 J2.40 J2.41 J2.42 J2.43 J2.44 J2.45 J2.46 J3. J3.3 J3.4 J4. J4.3 J4.4 J5.7 J5.8 J5.9 J5.10 J5.11 J5.12 J5.13 J5.14 J5.15 J5.16 J5.17 J5.18 J5.19 J5.20 J5.21 J5.22 J5.24 J5.25 J5.26 J5.32 J5.33 J5.34 J5.35 J5.36 J5.37 J5.38 J5.39 J5.40 J5.41 J6. J6.3 J6.4 U1.9 U1.12 U2.5

## Keep-outs
Keep-Out Layer:
  the board outline again, w0.254